# EAGLE board CT_schematic (EAGLE 7.6.0)

Size 100 x 80 mm. Coordinates in mm from the lower left corner, seen from the top.
Outline: 0,0 100,0 100,80 0,80 0,0
Copper layers (1*16): Top 0.035mm / dielectric 1.5mm / Bottom 0.035mm
Design rules "default": minimum track width 10mil, minimum drill 24mil, track to track 8mil, track to pad 8mil, pad to pad 8mil, via to via 8mil, smd to smd 8mil, copper to edge 40mil, drill to drill 8mil, minimum pad ring 10mil, minimum via ring 8mil, stop-mask expansion 4mil, vias tented up to drill 0mil, thermal gap 10mil

## Footprints (pad centres in the part's own frame; a part is rotated, then mirrored left to right if it is on the bottom)
C0603 = smd 0.8 x 0.8: 1 -0.762,0; 2 0.762,0
C0402 = smd 0.5 x 0.5: 1 -0.508,0; 2 0.508,0
C0805 = smd 1.2 x 1.3: 1 -1.016,0; 2 1.016,0
C1210 = smd 1.2 x 2.5: 1 -1.524,0; 2 1.524,0
EXV-9H = smd 3.505 x 1.676: 1 -2.857,0; 2 2.857,0
L0603 = smd 0.8 x 0.8: 1 -0.762,0; 2 0.762,0
PJ-037B_PACKAGE = drill 3.7 square: 1 12,0 | drill 3.2 square: 2 6,0
R0603 = smd 0.8 x 0.8: 1 -0.762,0; 2 0.762,0
LQFP208 = smd 0.3 x 1.2: 1 -12.75,-14.4; 2 -12.25,-14.4; 3 -11.75,-14.4; 4 -11.25,-14.4; 5 -10.75,-14.4; 6 -10.25,-14.4; 7 -9.75,-14.4; 8 -9.25,-14.4; 9 -8.75,-14.4; 10 -8.25,-14.4; 11 -7.75,-14.4; 12 -7.25,-14.4; 13 -6.75,-14.4; 14 -6.25,-14.4; 15 -5.75,-14.4; 16 -5.25,-14.4; 17 -4.75,-14.4; 18 -4.25,-14.4; 19 -3.75,-14.4; 20 -3.25,-14.4; 21 -2.75,-14.4; 22 -2.25,-14.4; 23 -1.75,-14.4; 24 -1.25,-14.4; 25 -0.75,-14.4; 26 -0.25,-14.4; 27 0.25,-14.4; 28 0.75,-14.4; 29 1.25,-14.4; 30 1.75,-14.4; 31 2.25,-14.4; 32 2.75,-14.4; 33 3.25,-14.4; 34 3.75,-14.4; 35 4.25,-14.4; 36 4.75,-14.4; 37 5.25,-14.4; 38 5.75,-14.4; 39 6.25,-14.4; 40 6.75,-14.4; 41 7.25,-14.4; 42 7.75,-14.4; 43 8.25,-14.4; 44 8.75,-14.4; 45 9.25,-14.4; 46 9.75,-14.4; 47 10.25,-14.4; 48 10.75,-14.4; 49 11.25,-14.4; 50 11.75,-14.4; 51 12.25,-14.4; 52 12.75,-14.4; 105 12.75,14.4; 106 12.25,14.4; 107 11.75,14.4; 108 11.25,14.4; 109 10.75,14.4; 110 10.25,14.4; 111 9.75,14.4; 112 9.25,14.4; 113 8.75,14.4; 114 8.25,14.4; 115 7.75,14.4; 116 7.25,14.4; 117 6.75,14.4; 118 6.25,14.4; 119 5.75,14.4; 120 5.25,14.4; 121 4.75,14.4; 122 4.25,14.4; 123 3.75,14.4; 124 3.25,14.4; 125 2.75,14.4; 126 2.25,14.4; 127 1.75,14.4; 128 1.25,14.4; 129 0.75,14.4; 130 0.25,14.4; 131 -0.25,14.4; 132 -0.75,14.4; 133 -1.25,14.4; 134 -1.75,14.4; 135 -2.25,14.4; 136 -2.75,14.4; 137 -3.25,14.4; 138 -3.75,14.4; 139 -4.25,14.4; 140 -4.75,14.4; 141 -5.25,14.4; 142 -5.75,14.4; 143 -6.25,14.4; 144 -6.75,14.4; 145 -7.25,14.4; 146 -7.75,14.4; 147 -8.25,14.4; 148 -8.75,14.4; 149 -9.25,14.4; 150 -9.75,14.4; 151 -10.25,14.4; 152 -10.75,14.4; 153 -11.25,14.4; 154 -11.75,14.4; 155 -12.25,14.4; 156 -12.75,14.4 | smd 1.2 x 0.3: 53 14.4,-12.75; 54 14.4,-12.25; 55 14.4,-11.75; 56 14.4,-11.25; 57 14.4,-10.75; 58 14.4,-10.25; 59 14.4,-9.75; 60 14.4,-9.25; 61 14.4,-8.75; 62 14.4,-8.25; 63 14.4,-7.75; 64 14.4,-7.25; 65 14.4,-6.75; 66 14.4,-6.25; 67 14.4,-5.75; 68 14.4,-5.25; 69 14.4,-4.75; 70 14.4,-4.25; 71 14.4,-3.75; 72 14.4,-3.25; 73 14.4,-2.75; 74 14.4,-2.25; 75 14.4,-1.75; 76 14.4,-1.25; 77 14.4,-0.75; 78 14.4,-0.25; 79 14.4,0.25; 80 14.4,0.75; 81 14.4,1.25; 82 14.4,1.75; 83 14.4,2.25; 84 14.4,2.75; 85 14.4,3.25; 86 14.4,3.75; 87 14.4,4.25; 88 14.4,4.75; 89 14.4,5.25; 90 14.4,5.75; 91 14.4,6.25; 92 14.4,6.75; 93 14.4,7.25; 94 14.4,7.75; 95 14.4,8.25; 96 14.4,8.75; 97 14.4,9.25; 98 14.4,9.75; 99 14.4,10.25; 100 14.4,10.75; 101 14.4,11.25; 102 14.4,11.75; 103 14.4,12.25; 104 14.4,12.75; 157 -14.4,12.75; 158 -14.4,12.25; 159 -14.4,11.75; 160 -14.4,11.25; 161 -14.4,10.75; 162 -14.4,10.25; 163 -14.4,9.75; 164 -14.4,9.25; 165 -14.4,8.75; 166 -14.4,8.25; 167 -14.4,7.75; 168 -14.4,7.25; 169 -14.4,6.75; 170 -14.4,6.25; 171 -14.4,5.75; 172 -14.4,5.25; 173 -14.4,4.75; 174 -14.4,4.25; 175 -14.4,3.75; 176 -14.4,3.25; 177 -14.4,2.75; 178 -14.4,2.25; 179 -14.4,1.75; 180 -14.4,1.25; 181 -14.4,0.75; 182 -14.4,0.25; 183 -14.4,-0.25; 184 -14.4,-0.75; 185 -14.4,-1.25; 186 -14.4,-1.75; 187 -14.4,-2.25; 188 -14.4,-2.75; 189 -14.4,-3.25; 190 -14.4,-3.75; 191 -14.4,-4.25; 192 -14.4,-4.75; 193 -14.4,-5.25; 194 -14.4,-5.75; 195 -14.4,-6.25; 196 -14.4,-6.75; 197 -14.4,-7.25; 198 -14.4,-7.75; 199 -14.4,-8.25; 200 -14.4,-8.75; 201 -14.4,-9.25; 202 -14.4,-9.75; 203 -14.4,-10.25; 204 -14.4,-10.75; 205 -14.4,-11.25; 206 -14.4,-11.75; 207 -14.4,-12.25; 208 -14.4,-12.75
SOT-23-6 = smd 1.1 x 0.6: 1 -1.4,0.95; 2 -1.4,0; 3 -1.4,-0.95; 4 1.4,-0.95; 5 1.4,0; 6 1.4,0.95
SAMTEC_FTSH-105-01-L-DV-K = smd 0.762 x 2.794: 1 -2.54,-2.032; 2 -2.54,2.032; 3 -1.27,-2.032; 4 -1.27,2.032; 5 0,-2.032; 6 0,2.032; 7 1.27,-2.032; 8 1.27,2.032; 9 2.54,-2.032; 10 2.54,2.032
MOLEX_47219-2001 = smd 0.8 x 1.5: 1 3.2,-2.1; 2 2.1,-2.1; 3 1,-2.1; 4 -0.1,-2.1; 5 -1.2,-2.1; 6 -2.3,-2.1; 7 -3.4,-2.1; 8 -4.5,-2.1 | smd 1.5 x 2.05: G1 6.875,-4.7; G2 6.875,3.6; G3 -6.875,3.6; G4 -6.875,-4.7
MICRO_USB_AB = smd 0.4 x 1.35: 1 1.3,0.26; 2 0.65,0.26; 3 0,0.26; 4 -0.65,0.26; 5 -1.3,0.26 | drill 0.6 pad 0.95 long: 6 4.175,-2.54; 7 -4.175,-2.54 | drill 0.7 pad 1.1 long: 8 -2.225,0.46; 9 2.225,0.46
SOT143B = smd 1 x 0.7: 1 -0.75,-1 | smd 0.6 x 0.7: 2 0.95,-1; 3 0.95,1; 4 -0.95,1
QFN-28 = smd 0.813 x 0.305: 1 -2.451,1.5; 2 -2.451,1; 3 -2.451,0.5; 4 -2.451,0; 5 -2.451,-0.5; 6 -2.451,-1; 7 -2.451,-1.5; 15 2.451,-1.5; 16 2.451,-1; 17 2.451,-0.5; 18 2.451,0; 19 2.451,0.5; 20 2.451,1; 21 2.451,1.5 | smd 0.305 x 0.813: 8 -1.5,-2.451; 9 -1,-2.451; 10 -0.5,-2.451; 11 0,-2.451; 12 0.5,-2.451; 13 1,-2.451; 14 1.5,-2.451; 22 1.5,2.451; 23 1,2.451; 24 0.5,2.451; 25 0,2.451; 26 -0.5,2.451; 27 -1,2.451; 28 -1.5,2.451 | smd 3.607 x 3.607: 29 0,0
SJ-43515TS-SMT-TR = smd 2.2 x 3: 1 0.6,-7.4; 4 3.4,-7.4 | smd 3 x 3: 2 12.8,-7.4; 5 17,-3 | smd 2 x 3: 3 5.3,0; 6 2.5,0 | drill 1.8: P$7 4.5,-3.69; P$8 11.54,-3.69
ASEK = smd 1.4 x 1: 1 -1.1,-0.8; 2 1.1,-0.8; 3 1.1,0.8; 4 -1.1,0.8
ASFL1 = smd 1.7 x 1.5: 1 -1.27,-1.1; 2 1.27,-1.1; 3 1.27,1.1; 4 -1.27,1.1
WSON-8 = smd 0.3 x 0.6: 1 -0.75,0; 2 0.05,0; 3 0.85,0; 4 1.65,0; 5 1.65,3.8; 6 0.85,3.8; 7 0.05,3.8; 8 -0.75,3.8 | smd 3 x 2.6: PAD 0.45,1.9
SON-6 = smd 0.55 x 0.3: 1 -0.355,0.5 | smd 0.52 x 0.3: 2 -0.37,0; 3 -0.37,-0.5; 4 0.37,-0.5; 5 0.37,0; 6 0.37,0.5
SW_4-1437565-2 = smd 1.4 x 2.1: 1 -2.23,4.55; 2 -2.23,-4.55; 3 2.23,4.55; 4 2.23,-4.55
LGM67K-G1J2-24-Z = smd 0.8 x 1.4: A -2,0; C 0,0
NC7SZ125M5X = smd 1.3 x 0.7: 1 -1.3,0.95; 2 -1.3,0; 3 -1.3,-0.95; 4 1.3,-0.95; 5 1.3,0.95

## Placement (x,y rotation side)
C1  1e-06  [C0603]  -66.04,91.44 0 top  (outside the outline)
C2  1e-07  [C0603]  -69.85,91.44 0 top  (outside the outline)
C3  1e-07  [C0603]  -73.66,91.44 0 top  (outside the outline)
C4  1e-07  [C0603]  -77.47,91.44 0 top  (outside the outline)
C5  1e-07  [C0603]  -81.28,91.44 0 top  (outside the outline)
C6  1e-07  [C0603]  -85.09,91.44 0 top  (outside the outline)
C7  1e-07  [C0603]  -88.9,91.44 0 top  (outside the outline)
C8  1e-07  [C0603]  -15.24,96.52 0 top  (outside the outline)
C9  1e-07  [C0603]  -19.05,96.52 0 top  (outside the outline)
C10  1e-07  [C0603]  -22.86,96.52 0 top  (outside the outline)
C11  1e-07  [C0603]  -26.67,96.52 0 top  (outside the outline)
C12  1e-07  [C0603]  -30.48,96.52 0 top  (outside the outline)
C13  1e-07  [C0603]  -34.29,96.52 0 top  (outside the outline)
C14  1e-07  [C0603]  -38.1,96.52 0 top  (outside the outline)
C15  1e-07  [C0603]  -41.91,96.52 0 top  (outside the outline)
C16  1e-07  [C0603]  -45.72,96.52 0 top  (outside the outline)
C17  1e-07  [C0603]  -49.53,96.52 0 top  (outside the outline)
C18  1e-07  [C0603]  -53.34,96.52 0 top  (outside the outline)
C19  1e-07  [C0603]  -57.15,96.52 0 top  (outside the outline)
C20  4.7e-06  [C0603]  -54.61,91.44 0 top  (outside the outline)
C21  2.2e-09  [C0603]  -58.42,91.44 0 top  (outside the outline)
C22  2.2e-09  [C0603]  -62.23,91.44 0 top  (outside the outline)
C23  1e-08  [C0603]  -60.96,96.52 0 top  (outside the outline)
C24  1e-06  [C0603]  -64.77,96.52 0 top  (outside the outline)
C25  1e-07  [C0402]  -30.48,101.6 0 top  (outside the outline)
C26  1e-07  [C0402]  -34.29,101.6 0 top  (outside the outline)
C27  1e-05  [C0805]  -58.42,80.01 0 top  (outside the outline)
C28  2.2e-05  [C1210]  -80.01,72.39 0 top  (outside the outline)
C29  2.2e-05  [C1210]  -86.36,72.39 0 top  (outside the outline)
C30  1e-09  [C0402]  -38.1,101.6 0 top  (outside the outline)
C31  1e-09  [C0402]  -41.91,101.6 0 top  (outside the outline)
C32  1e-07  [C0402]  -45.72,101.6 0 top  (outside the outline)
C33  1e-07  [C0402]  -49.53,101.6 0 top  (outside the outline)
C34  1e-07  [C0402]  -53.34,101.6 0 top  (outside the outline)
C35  1e-07  [C0402]  -57.15,101.6 0 top  (outside the outline)
C36  1e-07  [C0402]  -60.96,101.6 0 top  (outside the outline)
C37  1e-05  [C0805]  -63.5,80.01 0 top  (outside the outline)
C38  1e-05  [C0805]  -68.58,80.01 0 top  (outside the outline)
C39  1e-05  [C0805]  -73.66,80.01 0 top  (outside the outline)
C40  1e-05  [C0805]  -78.74,80.01 0 top  (outside the outline)
C41  1e-05  [C0805]  -83.82,80.01 0 top  (outside the outline)
C42  1e-08  [C0402]  -64.77,101.6 0 top  (outside the outline)
C43  1e-08  [C0402]  -68.58,101.6 0 top  (outside the outline)
C44  1e-08  [C0402]  -72.39,101.6 0 top  (outside the outline)
C45  1e-08  [C0402]  -76.2,101.6 0 top  (outside the outline)
C46  1e-05  [C1210]  -16.51,81.28 0 top  (outside the outline)
C47  1e-05  [C1210]  -22.86,81.28 0 top  (outside the outline)
C48  1e-08  [C0402]  -80.01,101.6 0 top  (outside the outline)
C49  1e-05  [C1210]  -29.21,81.28 0 top  (outside the outline)
C50  1e-05  [C1210]  -35.56,81.28 0 top  (outside the outline)
C51  1e-07  [C0402]  -83.82,101.6 0 top  (outside the outline)
C52  0.0001  [EXV-9H]  -38.1,73.66 0 top  (outside the outline)
C53  0.0001  [EXV-9H]  -49.53,73.66 0 top  (outside the outline)
C54  1e-08  [C0402]  -87.63,101.6 0 top  (outside the outline)
C55  1e-08  [C0402]  -15.24,106.68 0 top  (outside the outline)
F1  240.0  [L0603]  -68.58,96.52 0 top  (outside the outline)
J1  PJ-037B  [PJ-037B_PACKAGE]  -55.88,52.07 0 top  (outside the outline)
R2  1000.0  [R0603]  -72.39,96.52 0 top  (outside the outline)
R4  4700.0  [R0603]  -76.2,96.52 0 top  (outside the outline)
R5  47000.0  [R0603]  -60.96,86.36 0 top  (outside the outline)
R6  10000.0  [R0603]  -66.04,86.36 0 top  (outside the outline)
R7  10000.0  [R0603]  -71.12,86.36 0 top  (outside the outline)
R8  10000.0  [R0603]  -76.2,86.36 0 top  (outside the outline)
R9  10000.0  [R0603]  -81.28,86.36 0 top  (outside the outline)
R10  10000.0  [R0603]  -86.36,86.36 0 top  (outside the outline)
R11  10000.0  [R0603]  -15.24,91.44 0 top  (outside the outline)
R12  10000.0  [R0603]  -20.32,91.44 0 top  (outside the outline)
R13  10000.0  [R0603]  -25.4,91.44 0 top  (outside the outline)
R14  5.0  [R0603]  -80.01,96.52 0 top  (outside the outline)
R15  100000.0  [R0603]  -88.9,80.01 0 top  (outside the outline)
R16  100000.0  [R0603]  -15.24,86.36 0 top  (outside the outline)
R17  100000.0  [R0603]  -20.32,86.36 0 top  (outside the outline)
R18  100000.0  [R0603]  -25.4,86.36 0 top  (outside the outline)
R19  100000.0  [R0603]  -30.48,86.36 0 top  (outside the outline)
R20  100000.0  [R0603]  -35.56,86.36 0 top  (outside the outline)
R21  47000.0  [R0603]  -30.48,91.44 0 top  (outside the outline)
R22  47000.0  [R0603]  -35.56,91.44 0 top  (outside the outline)
R23  47000.0  [R0603]  -40.64,91.44 0 top  (outside the outline)
R24  680.0  [R0603]  -83.82,96.52 0 top  (outside the outline)
R25  100000.0  [R0603]  -40.64,86.36 0 top  (outside the outline)
R26  2231.0  [R0603]  -87.63,96.52 0 top  (outside the outline)
R27  1000.0  [R0603]  -15.24,101.6 0 top  (outside the outline)
R28  100000.0  [R0603]  -45.72,86.36 0 top  (outside the outline)
R29  3900.0  [R0603]  -19.05,101.6 0 top  (outside the outline)
R30  1000.0  [R0603]  -22.86,101.6 0 top  (outside the outline)
R31  10000.0  [R0603]  -45.72,91.44 0 top  (outside the outline)
R32  10000.0  [R0603]  -50.8,91.44 0 top  (outside the outline)
R33  9100.0  [R0603]  -26.67,101.6 0 top  (outside the outline)
R34  680000.0  [R0603]  -50.8,86.36 0 top  (outside the outline)
R35  120000.0  [R0603]  -55.88,86.36 0 top  (outside the outline)
U1  STM32F429BGT6  [LQFP208]  -27.94,15.24 0 top  (outside the outline)
U2  MAX4995AAUT+T  [SOT-23-6]  -40.64,80.01 0 top  (outside the outline)
U3  FTSH-105-01-L-DV-K  [SAMTEC_FTSH-105-01-L-DV-K]  -35.56,38.1 0 top  (outside the outline)
U4  0472192001  [MOLEX_47219-2001]  -53.34,8.89 0 top  (outside the outline)
U5  47590-0001  [MICRO_USB_AB]  -64.77,53.34 0 top  (outside the outline)
U6  prtr5v0u2ax  [SOT143B]  -27.94,106.68 0 top  (outside the outline)
U7  WM8731CLSEFL  [QFN-28]  -72.39,72.39 0 top  (outside the outline)
U8  SJ-43515TS-SMT-TR  [SJ-43515TS-SMT-TR]  -68.58,39.37 0 top  (outside the outline)
U9  SJ-43515TS-SMT-TR  [SJ-43515TS-SMT-TR]  -39.37,54.61 0 top  (outside the outline)
U10  ASEK-32.768KHz-ECST  [ASEK]  -29.21,73.66 0 top  (outside the outline)
U11  ASFL1-12.288MHZ-EC-T  [ASFL1]  -71.12,64.77 0 top  (outside the outline)
U12  ASFL1-25MHZ-NCS  [ASFL1]  -87.63,64.77 0 top  (outside the outline)
U13  LP3878SDX-ADJ/NOPB  [WSON-8]  -30.48,62.23 0 top  (outside the outline)
U14  LP3878SDX-ADJ/NOPB  [WSON-8]  -50.8,62.23 0 top  (outside the outline)
U15  TPS3895ADRYR  [SON-6]  -31.75,105.41 0 top  (outside the outline)
U16  4-1437565-2  [SW_4-1437565-2]  -85.09,50.8 0 top  (outside the outline)
U17  Q65110A2395  [LGM67K-G1J2-24-Z]  -59.69,72.39 0 top  (outside the outline)
U18  nc7sz125m5x  [NC7SZ125M5X]  -45.72,80.01 0 top  (outside the outline)
U19  nc7sz125m5x  [NC7SZ125M5X]  -52.07,80.01 0 top  (outside the outline)

## Library data of the parts
C1-C55 F1 J1 R2 R4-R35 U1-U19 = circuit_tree

## Nets
CLK_U1_9: U1.9 U10.3
CLK_U1_32: U1.32 U12.3
CLK_U7_1: U7.1 U11.3
GND: C1.2 C2.2 C3.2 C4.2 C5.2 C6.2 C7.2 C8.2 C9.2 C10.2 C11.2 C12.2 C13.2 C14.2 C15.2 C16.2 C17.2 C18.2 C19.2 C20.2 C21.2 C22.2 C23.2 C24.2 C25.2 C26.2 C27.2 C31.2 C32.2 C33.2 C34.2 C35.2 C36.2 C37.2 C38.2 C39.2 C40.2 C41.2 C42.2 C43.2 C44.2 C45.2 C46.2 C47.2 C48.2 C49.2 C50.2 C51.2 C52.2 C53.2 C54.2 C55.2 J1.2 R2.2 R5.2 R8.2 R10.2 R14.2 R21.2 R22.2 R23.2 R27.2 R30.2 R33.2 R35.2 U1.14 U1.25 U1.40 U1.51 U1.60 U1.72 U1.82 U1.93 U1.114 U1.125 U1.136 U1.149 U1.170 U1.184 U1.202 U2.2 U3.3 U3.5 U4.6 U4.G1 U4.G2 U4.G3 U4.G4 U5.5 U5.6 U5.7 U5.8 U5.9 U6.1 U7.4 U7.15 U7.19 U7.25 U7.26 U7.29 U8.1 U9.1 U10.2 U11.2 U12.2 U13.3 U13.PAD U14.3 U14.PAD U15.2 U17.C U18.2 U18.3 U19.1 U19.3
NET_U1_34: R4.1 U1.34 U19.4
NET_U1_42: C23.1 C24.1 F1.1 U1.41 U1.42
NET_U1_63: R8.1 U1.63
NET_U1_92: C21.1 U1.92
NET_U1_148: C22.1 U1.148
NET_U1_197: R7.1 U1.197
NET_U1_203: R6.1 U1.203
NET_U1_207: U17.A
NET_U1_208: U16.3 U16.4
NET_U2_3: R5.1 U2.3
NET_U3_9: R14.1 U3.9
NET_U7_9: U7.9
NET_U7_20: C36.1 C41.1 U7.20
NET_U8_2: C29.1 R22.1 U8.2
NET_U8_5: C28.1 R21.1 U8.5
NET_U8_13: C28.2
NET_U8_14: C29.2
NET_U9_5: C30.1 C31.1 R23.1 R24.1 U9.5
NET_U9_21: R24.2
NET_U9_22: C30.2
NET_U13_1: C45.1 U13.1
NET_U13_6: R26.2 R27.1 U13.6
NET_U13_8: R25.1 U13.8
NET_U14_1: C48.1 U14.1
NET_U14_6: R29.2 R30.1 U14.6
NET_U14_8: R28.1 U14.8
NET_U15_1: R32.1 R33.1 U15.1
NET_U15_3: R34.2 R35.1 U15.3
NET_U15_4: R31.1 U15.4 U18.4 U19.2
NET_U16_1: R2.1 U16.1 U16.2
PROC_GPIO_TO_U1_USB_FAULT: R9.1 U1.2 U2.6
PROC_GPIO_TO_U1_VBUS_EN: R10.1 U1.1 U2.4
PROC_I2S2_CK: U1.90 U7.7
PROC_I2S2_EXT_SD: U1.37 U7.10
PROC_I2S2_SD: U1.38 U7.8
PROC_I2S2_WS: U1.104 U7.9 U7.11
PROC_SDIO_CK: R16.1 U1.163 U4.5
PROC_SDIO_CMD: R15.1 U1.166 U4.3
PROC_SDIO_D0: R17.1 U1.140 U4.7
PROC_SDIO_D1: R18.1 U1.141 U4.8
PROC_SDIO_D2: R19.1 U1.161 U4.1
PROC_SDIO_D3: R20.1 U1.162 U4.2
PROC_SYS_JTCK_SWCLK: R12.1 U1.159 U3.4
PROC_SYS_JTDO_SWO: U1.192 U3.6
PROC_SYS_JTMS_SWDIO: R13.1 U1.147 U3.2
PROC_USB_OTG_FS_DM: U1.145 U5.2 U6.3
PROC_USB_OTG_FS_DP: U1.146 U5.3 U6.2
PROC_USB_OTG_FS_ID: U1.144 U5.4
PROC_USB_OTG_FS_VBUS: U1.143 U2.1 U5.1 U6.4
RST_OUT_U3_JTAG_RST_B: R11.1 U3.10 U18.1
VCC_S1_11V2: C46.1 C49.1 C52.1 C53.1 J1.1 R25.2 R28.2 U13.4 U14.4
VCC_TIER1_3V3: C1.1 C2.1 C3.1 C4.1 C5.1 C6.1 C7.1 C8.1 C9.1 C10.1 C11.1 C12.1 C13.1 C14.1 C15.1 C16.1 C17.1 C18.1 C19.1 C20.1 C25.1 C26.1 C27.1 C32.1 C33.1 C34.1 C35.1 C37.1 C38.1 C39.1 C40.1 C42.1 C43.1 C44.1 C47.1 C51.1 C54.1 C55.1 F1.2 R4.2 R6.2 R7.2 R9.2 R11.2 R12.2 R13.2 R15.2 R16.2 R17.2 R18.2 R19.2 R20.2 R26.1 R31.2 R32.2 R34.1 U1.6 U1.15 U1.26 U1.39 U1.52 U1.59 U1.73 U1.83 U1.94 U1.103 U1.115 U1.124 U1.137 U1.150 U1.158 U1.171 U1.185 U1.204 U3.1 U4.4 U7.3 U7.5 U7.12 U7.18 U10.4 U11.4 U12.4 U13.5 U15.6 U18.5 U19.5
VCC_TIER1_5V0: C50.1 R29.1 U2.5 U14.5

## Tracks (layer width: path | path; a pad name or v marks a point on that pad's centre or on a via)
CLK_U1_9  (1 unrouted)
CLK_U1_32  (1 unrouted)
CLK_U7_1  (1 unrouted)
GND  (114 unrouted)
NET_U1_34  (2 unrouted)
NET_U1_42  (4 unrouted)
NET_U1_63  (1 unrouted)
NET_U1_92  (1 unrouted)
NET_U1_148  (1 unrouted)
NET_U1_197  (1 unrouted)
NET_U1_203  (1 unrouted)
NET_U1_208  (1 unrouted)
NET_U2_3  (1 unrouted)
NET_U3_9  (1 unrouted)
NET_U7_20  (2 unrouted)
NET_U8_2  (2 unrouted)
NET_U8_5  (2 unrouted)
NET_U9_5  (4 unrouted)
NET_U13_1  (1 unrouted)
NET_U13_6  (2 unrouted)
NET_U13_8  (1 unrouted)
NET_U14_1  (1 unrouted)
NET_U14_6  (2 unrouted)
NET_U14_8  (1 unrouted)
NET_U15_1  (2 unrouted)
NET_U15_3  (2 unrouted)
NET_U15_4  (3 unrouted)
NET_U16_1  (2 unrouted)
PROC_GPIO_TO_U1_USB_FAULT  (2 unrouted)
PROC_GPIO_TO_U1_VBUS_EN  (2 unrouted)
PROC_I2S2_CK  (1 unrouted)
PROC_I2S2_EXT_SD  (1 unrouted)
PROC_I2S2_SD  (1 unrouted)
PROC_I2S2_WS  (2 unrouted)
PROC_SDIO_CK  (2 unrouted)
PROC_SDIO_CMD  (2 unrouted)
PROC_SDIO_D0  (2 unrouted)
PROC_SDIO_D1  (2 unrouted)
PROC_SDIO_D2  (2 unrouted)
PROC_SDIO_D3  (2 unrouted)
PROC_SYS_JTCK_SWCLK  (2 unrouted)
PROC_SYS_JTDO_SWO  (1 unrouted)
PROC_SYS_JTMS_SWDIO  (2 unrouted)
PROC_USB_OTG_FS_DM  (2 unrouted)
PROC_USB_OTG_FS_DP  (2 unrouted)
PROC_USB_OTG_FS_ID  (1 unrouted)
PROC_USB_OTG_FS_VBUS  (3 unrouted)
RST_OUT_U3_JTAG_RST_B  (2 unrouted)
VCC_S1_11V2  (8 unrouted)
VCC_TIER1_3V3  (86 unrouted)
VCC_TIER1_5V0  (3 unrouted)